# Altium PCB Receiver.PcbDoc
Units mm, origin at the board's own origin, x right, y up, seen from the top; angles counter-clockwise.
Board outline 69.6 x 67.69 mm, 2 copper layers (Top Layer, Bottom Layer); 10 components, 20 nets, 76 pads, 4 vias.
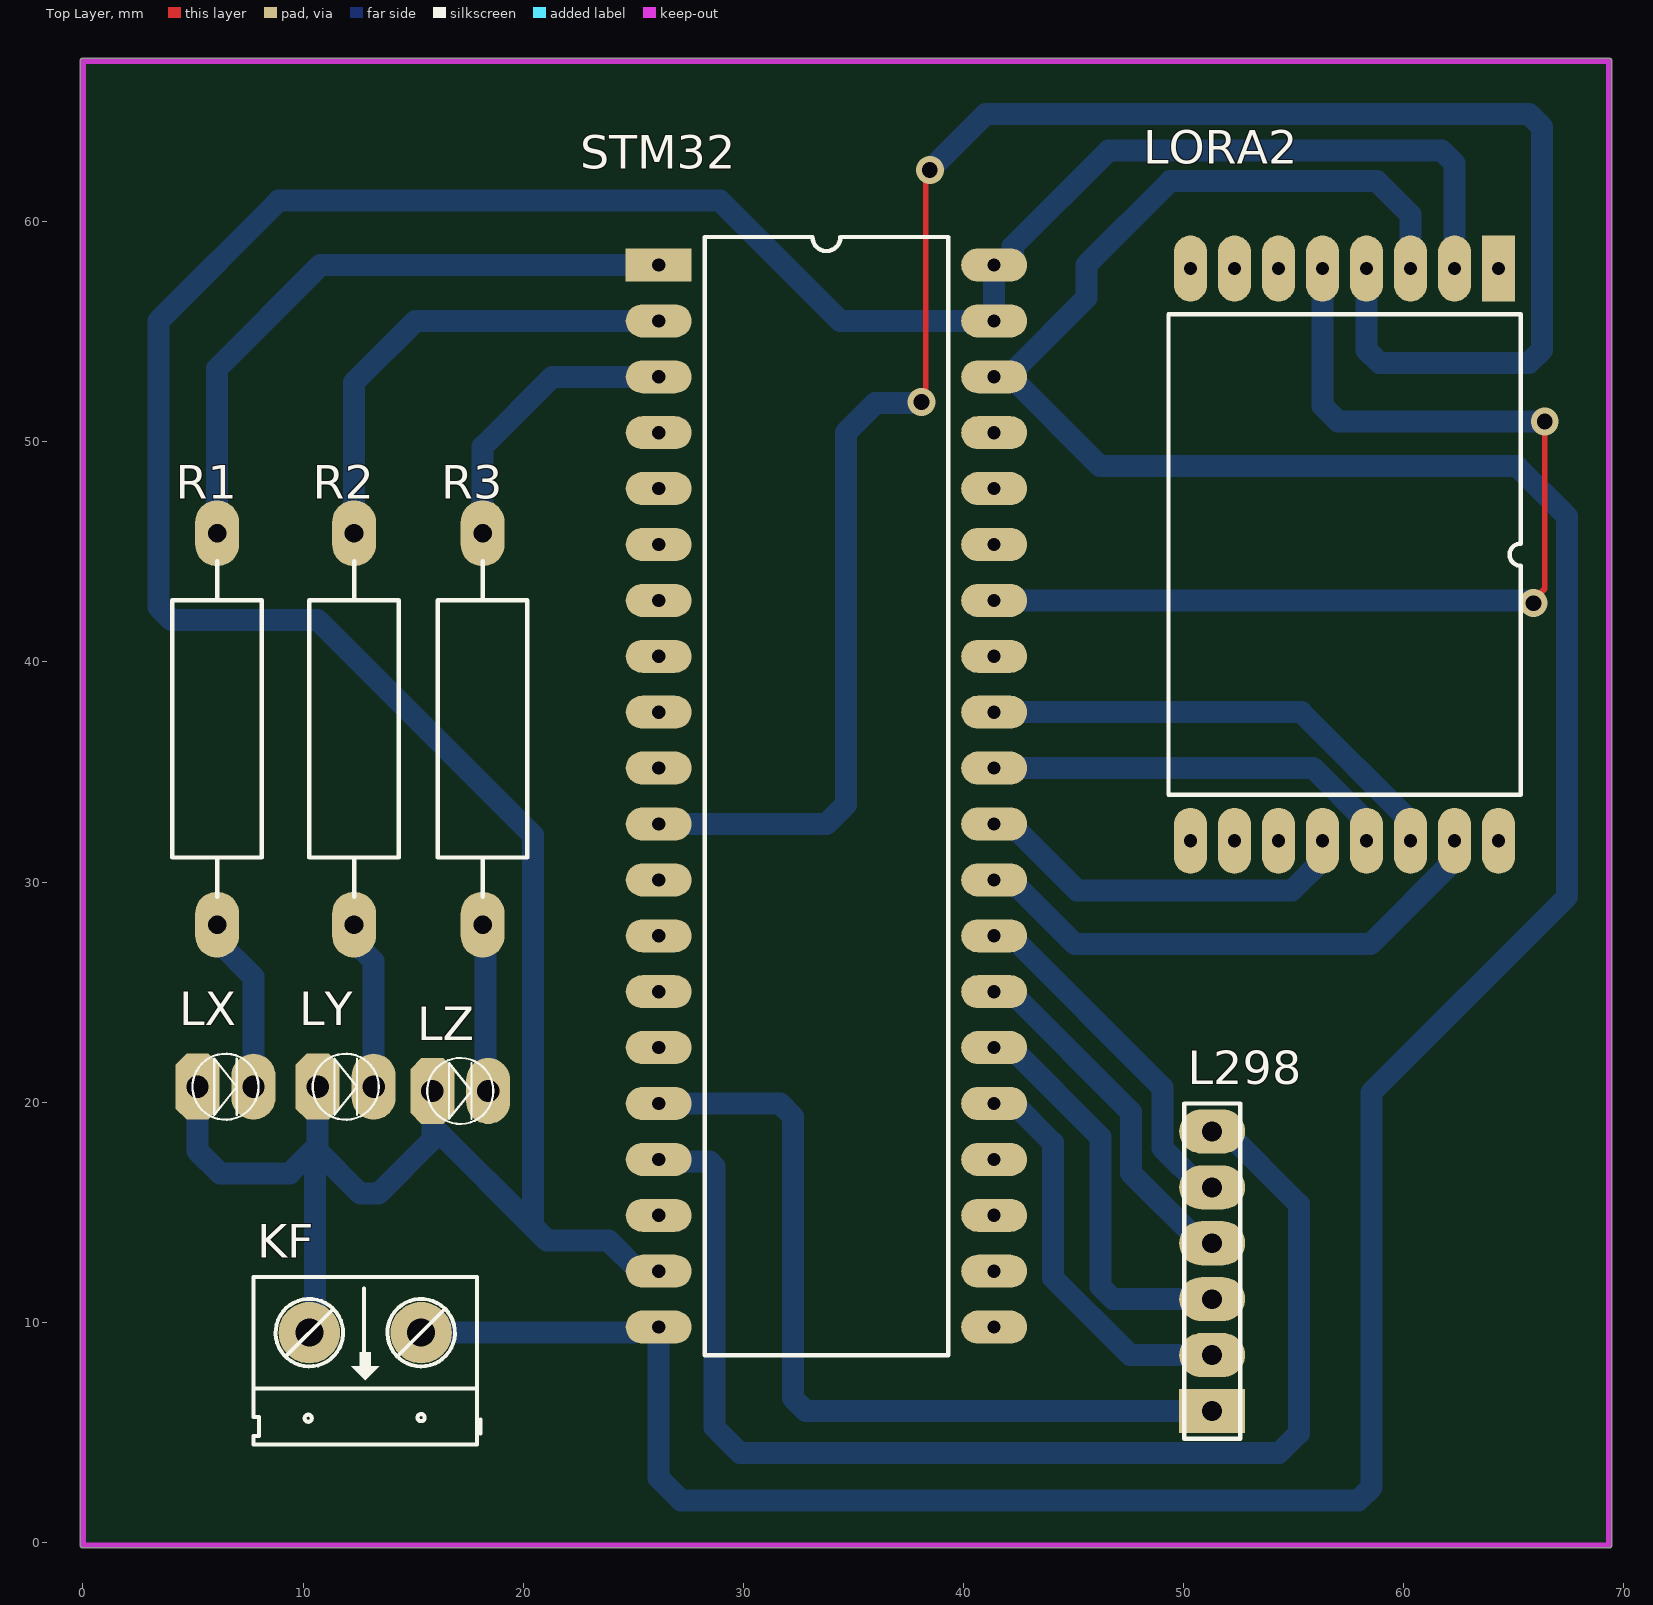
[diagram p0: Top Layer view]
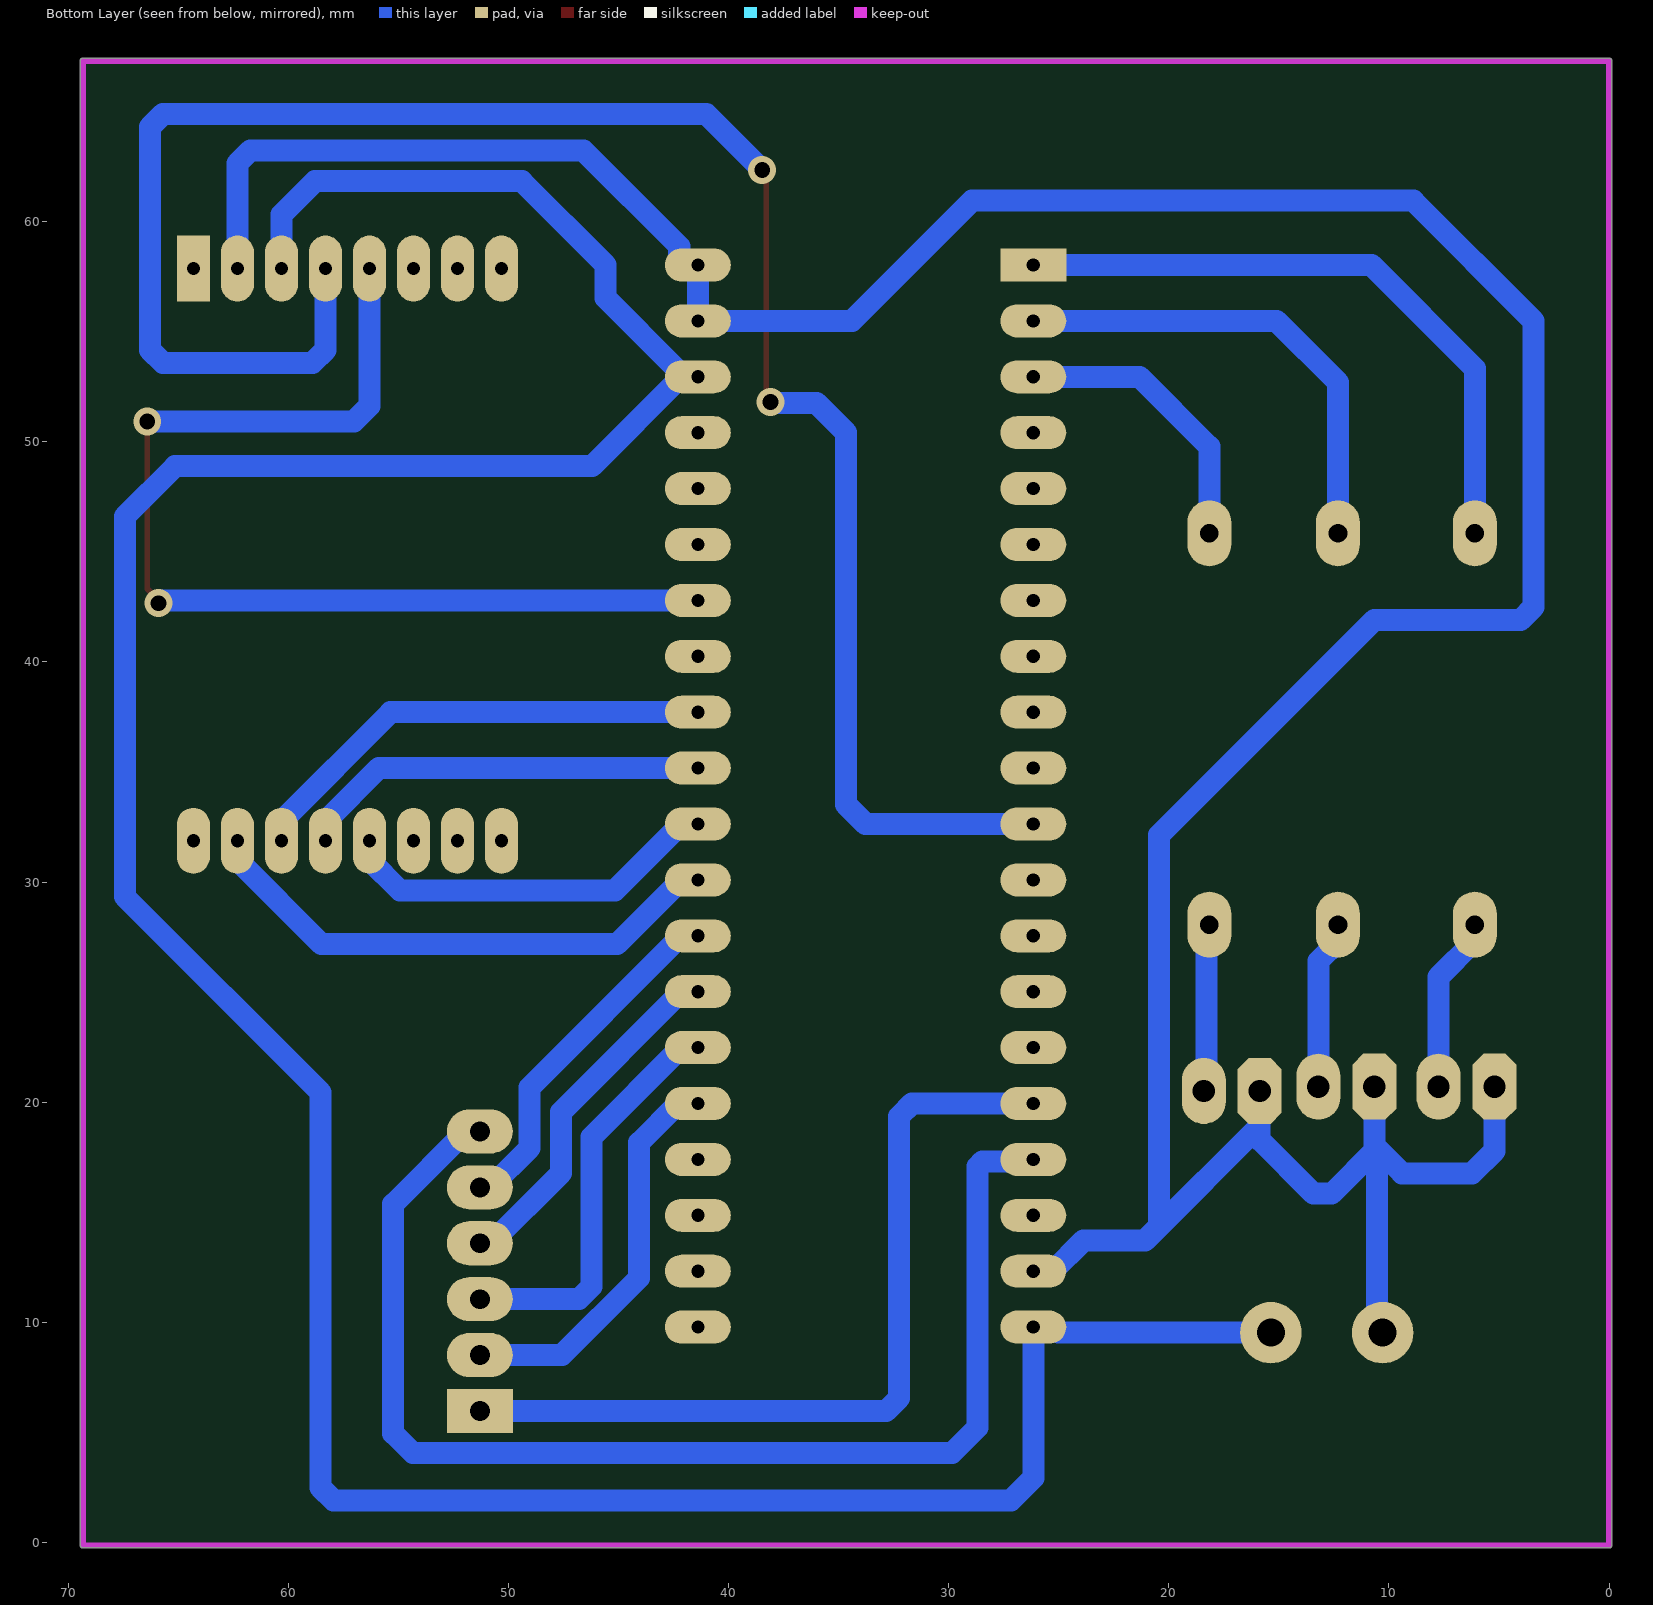
[diagram p1: Bottom Layer view, seen from below]
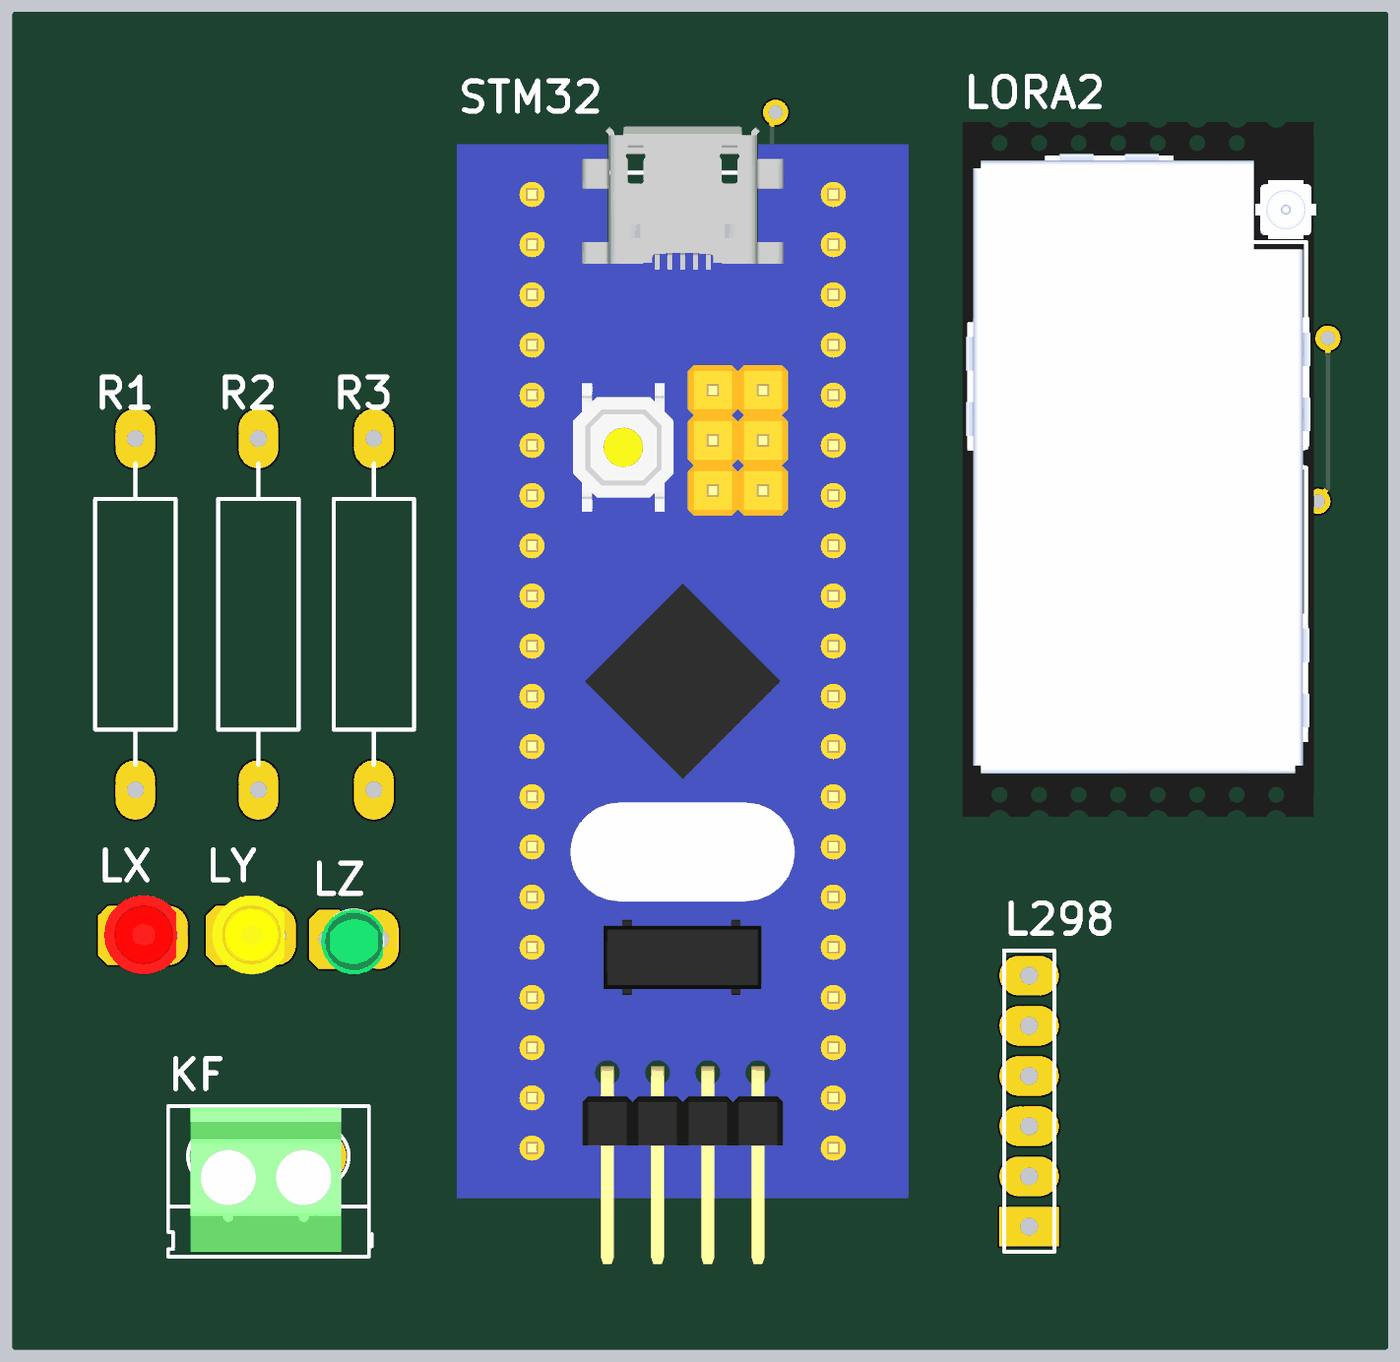
[diagram p2: 3D render of the assembled board from above, using the file's embedded part models]

## Layer stack, top to bottom
Top Solder: solder mask 0.0102, Solder Resist, Dk 3.5
Top Layer: signal copper 0.0356
Dielectric 1: dielectric 0.32, FR-4, Dk 4.8
Bottom Layer: signal copper 0.0356
Bottom Solder: solder mask 0.0102, Solder Resist, Dk 3.5

## Board outline
0,-0.254 cw(c0,-0.127) -0.127,-0.127 -0.127,67.31 cw(c0,67.31) 0,67.437 69.342,67.437 cw(c69.342,67.31) 69.469,67.31 69.469,-0.127 cw(c69.342,-0.127) 69.342,-0.254

## Design rules (kind name [scope] priority, off if disabled: settings)
Clearance [All] p1: gap=0.254 ignorepadtopadclearanceinfootprint=FALSE except(0: Arc-Hole Track-Hole SMDPad-Hole THPad-Hole Via-Hole Fill-Hole Poly-Hole Region-Hole Text-Hole)
PolygonConnect [All] p1: connectstyle=Relief reliefconductorwidth=0.254 reliefentries=4 polygonreliefangle="90 Angle" airgapwidth=0.254
RoutingVias [All] p1: holewidth=0.711 width=1.27 viastyle="Through Hole" minholewidth=0.711 minwidth=1.27 maxholewidth=0.711 maxwidth=1.27
SolderMaskExpansion [All] p1: expansion=0.102 istentingtop=FALSE
Width [All] p1: maxlimit=1 minlimit=0.254 preferedwidth=0.7 toplayer_maxwidth=0.254 toplayer_prefwidth=0.254 minimp=50.000000 maximp=50.000000 favimp=50.000000
30 further rules are at their usual default settings.

## Components (designator, comment, footprint, x,y, rotation, side; value= is the part's Value field where it differs from the comment)
KF "CON 2 KF301" "Con 2 KF301 5.08" 15.367,9.525 r180 top
L298 "Header 6" HDR1X6 51.308,5.969 r90 top
LORA2 "Component_1" "DIP16 - duplicate1" 64.324,57.877 r270 top
LX "LED 3mm" LED-3MM-RED 5.207,20.701 r0 top
LY "LED 3mm" LED-3MM-YELLOW 10.668,20.701 r0 top
LZ "LED 3mm" LED-3MM-GREEN 15.875,20.509 r0 top
R1 "Res Adj1" AXIAL-0.7 6.096,36.957 r90 top value=1K
R2 "Res Adj1" AXIAL-0.7 12.319,36.957 r90 top value=1K
R3 "Res Adj1" AXIAL-0.7 18.161,36.957 r90 top value=1K
STM32 "KIT STM32F103C8T6" "STM32F103 KIT" 26.162,58.039 r0 top

## Footprints (in the part's own frame and the unit in brackets; to place one, negate y for a bottom-side part, rotate by r counter-clockwise, add the part's x,y. Pads: shape width x height; smd on the part's side, far side on the other; paste and mask are expansions set on the pad)
AXIAL-0.7 [mm] "Axial Device, Thru-Hole; 2 Leads; 0.7 in Pin Spacing"
  oval 3x2 hole 0.85: 1(-8.89,0) 2(8.89,0)
  silkscreen extent -7.62,-2.03 7.62,2.03
"Con 2 KF301 5.08" [mil]
  round 110 hole 50: 1(0,0) 2(200,0)
  silkscreen extent -106,-100 300,200, body extent -45,-97 255,190, height 335
"DIP16 - duplicate1" [mm]
  rect 3x1.5 hole 0.6: 1(0,0)
  oval 3x1.5 hole 0.6: 2(0,-2) 3(0,-4) 4(0,-6) 5(0,-8) 6(0,-10) 7(0,-12) 8(0,-14) 9(26,-14) 10(26,-12) 11(26,-10) 12(26,-8) 13(26,-6) 14(26,-4) 15(26,-2) 16(26,0)
  silkscreen extent 2.08,-15 23.91,1, body extent -4,-16.38 31.18,1.52, height 2.1
HDR1X6 [mm] "Connector; Header; 6 Position"
  rect 2x3 hole 0.9: 1(0,0)
  oval 2x3 hole 0.9: 2(2.54,0) 3(5.08,0) 4(7.62,0) 5(10.16,0) 6(12.7,0)
  silkscreen extent -1.27,-1.27 13.97,1.27
LED-3MM-GREEN [mm]
  oct 2x3 hole 1.016: 1(0,0)
  oval 2x3 hole 1.016: 2(2.54,0)
  silkscreen extent -0.23,-1.5 2.77,1.5, body extent -0.38,-1.78 2.83,1.52, height 4.63
LED-3MM-RED [mm]
  oct 2x3 hole 1.016: 1(0,0)
  oval 2x3 hole 1.016: 2(2.54,0)
  silkscreen extent -0.23,-1.5 2.77,1.5, body extent -0.69,-1.97 2.98,2.03, height 4.6
LED-3MM-YELLOW [mm]
  oct 2x3 hole 1.016: 1(0,0)
  oval 2x3 hole 1.016: 2(2.54,0)
  silkscreen extent -0.23,-1.5 2.77,1.5, body extent -0.69,-1.97 2.98,2.03, height 4.6
"STM32F103 KIT" [mm]
  rect 3x1.5 hole 0.6: 1(0,0)
  oval 3x1.5 hole 0.6: 2(0,-2.54) 3(0,-5.08) 4(0,-7.62) 5(0,-10.16) 6(0,-12.7) 7(0,-15.24) 8(0,-17.78) 9(0,-20.32) 10(0,-22.86) 11(0,-25.4) 12(0,-27.94) 13(0,-30.48) 14(0,-33.02) 15(0,-35.56) 16(0,-38.1) 17(0,-40.64) 18(0,-43.18) 19(0,-45.72) 20(0,-48.26) 21(15.24,-48.26) 22(15.24,-45.72) 23(15.24,-43.18) 24(15.24,-40.64) 25(15.24,-38.1) 26(15.24,-35.56) 27(15.24,-33.02) 28(15.24,-30.48) 29(15.24,-27.94) 30(15.24,-25.4) 31(15.24,-22.86) 32(15.24,-20.32) 33(15.24,-17.78) 34(15.24,-15.24) 35(15.24,-12.7) 36(15.24,-10.16) 37(15.24,-7.62) 38(15.24,-5.08) 39(15.24,-2.54) 40(15.24,0)
  silkscreen extent 2.08,-49.53 13.16,1.27, body extent -3.81,-53.97 19.05,3.59, height 16.12

## Part data
KF: "Cắm", Chung_Loai=Cắm, Don_Vi=Con, Ma_Hang=MH000987, Ten_Linh_Kien="CON 2 KF301-2P 5.08MM Xanh Dương"
L298: "Header, 6-Pin", LatestRevisionDate=17-Jul-2002, LatestRevisionNote="Re-released for DXP Platform.", Publisher="Altium Limited"
LX: library part "LED 3mm Do", "Cắm", Chung_Loai=Cắm, Don_Vi=Con, Ma_Hang=MH003892, Ten_Linh_Kien="Led 3MM Phủ Đỏ (10c)"
LY: library part "LED 3mm Vang", "Cắm", Chung_Loai=Cắm, Don_Vi=Con, Ma_Hang=MH003893, Ten_Linh_Kien="Led 3MM Phủ Vàng (10c)"
LZ: library part "LED 3mm Xanh La", "Cắm", Chung_Loai=Cắm, Don_Vi=Con, Ma_Hang=MH001054, Ten_Linh_Kien="Led 3MM Phủ Xanh (10c)"
R1 R2 R3: "Variable Resistor", LatestRevisionDate=17-Jul-2002, LatestRevisionNote="Re-released for DXP Platform.", PackageDescription="Axial Device, Thru-Hole; 2 Leads; 0.7 in Pin Spacing", PackageReference=AXIAL-0.7, Published=8-Jun-2000, Publisher="Altium Limited", Set Position=0.5
STM32: library part "STM32f103 Bluepill", "KIT STM32F103C8T6 Bluepill"

## Via types
v1: diameter 1.27, hole 0.711, Top Layer to Bottom Layer, 4 vias

## Nets (pads, with @x,y where several pads share a name; then routed paths per layer and width w, separated by ;. In a path a pad name is that pad's centre, name@x,y a point inside that pad or via, vN(x,y) a via of type N, cw(c..) or ccw(c..) an arc to the next point about the centre after c; other vN are vias at no path point)
NetKF_1: KF.1 LORA2.3 STM32.20 STM32.38 | length 153.2
  Bottom Layer w1: KF.1 25.023,9.525 25.277,9.779 STM32.20 26.162,2.921 27.178,1.905 57.961,1.905 58.547,2.491 58.547,20.447 67.437,29.337 67.437,46.609 65.151,48.895 46.216,48.895 42.152,52.959 STM32.38@42.017,52.959 ; STM32.38 STM32.38@42.017,52.959 ; LORA2.3 60.324,60.326 58.801,61.849 49.403,61.849 45.593,58.039 45.593,56.535 42.402,53.344 STM32.38@42.017,52.959
NetKF_2: KF.2 LORA2.2 LX.1 LY.1 LZ.1 STM32.19 STM32.39 STM32.40 | length 168.3
  Bottom Layer w1: LX.1 5.207,17.78 6.223,16.764 9.398,16.764 10.668,18.034 ; KF.2 10.541,9.779 10.541,17.907 12.603,15.845 13.432,15.845 15.875,18.288 15.875,18.923 ; 10.668,18.249 LY.1 ; LZ.1 15.875,19.802 15.875,18.923 ; STM32.19 25.277,12.319 23.88,13.716 21.082,13.716 20.447,14.351 ; LORA2.2 62.324,62.66 61.738,63.246 46.609,63.246 42.248,58.885 42.248,58.27 42.017,58.039 STM32.40 STM32.39 34.407,55.499 28.946,60.96 8.89,60.96 3.429,55.499 3.429,42.496 4.015,41.91 10.668,41.91 20.447,32.131 20.447,14.351 ; 15.875,18.923 16.192,18.605 20.447,14.351
NetL298_1: L298.1 STM32.16 | length 38.4
  Bottom Layer w1: STM32.16 31.672,19.939 32.258,19.353 32.258,6.555 32.844,5.969 L298.1
NetL298_2: L298.2 STM32.25 | length 18.2
  Bottom Layer w1: STM32.25 42.287,19.939 44.069,18.157 44.069,12.02 47.58,8.509 L298.2
NetL298_3: L298.3 STM32.26 | length 18.6
  Bottom Layer w1: STM32.26 42.169,22.479 46.228,18.42 46.228,11.635 46.814,11.049 L298.3
NetL298_4: L298.4 STM32.27 | length 16.3
  Bottom Layer w1: STM32.27 42.152,25.019 47.625,19.546 47.625,16.772 50.808,13.589 L298.4
NetL298_5: L298.5 STM32.28 | length 16.2
  Bottom Layer w1: STM32.28 42.152,27.559 49.054,20.657 49.054,17.911 50.836,16.129 L298.5
NetL298_6: L298.6 STM32.17 | length 57.6
  Bottom Layer w1: STM32.17 26.258,17.303 28.466,17.303 28.702,17.067 28.702,5.207 29.845,4.064 54.356,4.064 55.245,4.953 55.245,15.367 51.943,18.669 L298.6
NetLORA2_4: LORA2.4 STM32.11 | length 91.9
  Top Layer w0.254: v1(38.1,51.816) 38.291,52.006 38.291,62.166 v1(38.481,62.357)
  Bottom Layer w1: STM32.11 33.782,32.639 34.671,33.528 34.671,50.427 36.008,51.764 38.048,51.764 v1(38.1,51.816) ; v1(38.481,62.357) 41.021,64.897 65.708,64.897 66.294,64.311 66.294,54.18 65.708,53.594 58.91,53.594 58.324,54.18 LORA2.4
NetLORA2_5: LORA2.5 STM32.34 | length 49.7
  Top Layer w0.254: v1(65.913,42.672) 65.913,42.821 66.421,43.329 v1(66.421,50.927)
  Bottom Layer w1: STM32.34 65.713,42.799 65.84,42.672 v1(65.913,42.672) ; LORA2.5 56.324,51.64 57.037,50.927 v1(66.421,50.927)
NetLORA2_12: LORA2.12 STM32.30 | length 17.6
  Bottom Layer w1: STM32.30 42.152,32.639 45.168,29.623 54.947,29.623 56.324,31 LORA2.12
NetLORA2_13: LORA2.13 STM32.31 | length 18.8
  Bottom Layer w1: STM32.31 55.899,35.179 58.324,32.754 LORA2.13
NetLORA2_14: LORA2.14 STM32.32 | length 21.9
  Bottom Layer w1: STM32.32 55.359,37.719 60.324,32.754 LORA2.14
NetLORA2_15: LORA2.15 STM32.29 | length 24.6
  Bottom Layer w1: STM32.29 42.152,30.099 45.073,27.178 58.502,27.178 62.324,31 LORA2.15
NetLX_2: LX.2 R1.1 | length 8
  Bottom Layer w1: R1.1 6.096,27.333 7.747,25.682 LX.2
NetLY_2: LY.2 R2.1 | length 7.7
  Bottom Layer w1: R2.1 12.319,27.296 13.208,26.407 LY.2
NetLZ_2: LZ.2 R3.1 | length 7.7
  Bottom Layer w1: R3.1 18.288,27.94 18.288,20.636 LZ.2
NetR1_2: R1.2 STM32.1 | length 29.5
  Bottom Layer w1: R1.2 6.096,53.34 10.795,58.039 STM32.1
NetR2_2: R2.2 STM32.2 | length 21.9
  Bottom Layer w1: R2.2 12.319,52.705 15.113,55.499 STM32.2
NetR3_2: R3.2 STM32.3 | length 13.3
  Bottom Layer w1: R3.2 18.161,49.784 21.336,52.959 STM32.3
pads on no net: LORA2.1 LORA2.6 LORA2.7 LORA2.8 LORA2.9 LORA2.10 LORA2.11 LORA2.16 STM32.4 STM32.5 STM32.6 STM32.7 STM32.8 STM32.9 STM32.10 STM32.12 STM32.13 STM32.14 STM32.15 STM32.18 STM32.21 STM32.22 STM32.23 STM32.24 STM32.33 STM32.35 STM32.36 STM32.37

## Keep-outs
Keep-Out Layer:
  lines w0.254: 0,-0.127 0,67.31 69.342,67.31 69.342,-0.127 0,-0.127